# Altium PCB PCB1.PcbDoc
Units mm, origin at the board's own origin, x right, y up, seen from the top; angles counter-clockwise.
Board outline 76.33 x 63.37 mm, 4 copper layers (L1 Top Layer, L2 GND, L3 POWER, L4 Bottom Layer), stack 1.586 mm thick; 47 components, 47 nets, 172 pads, 25 vias.
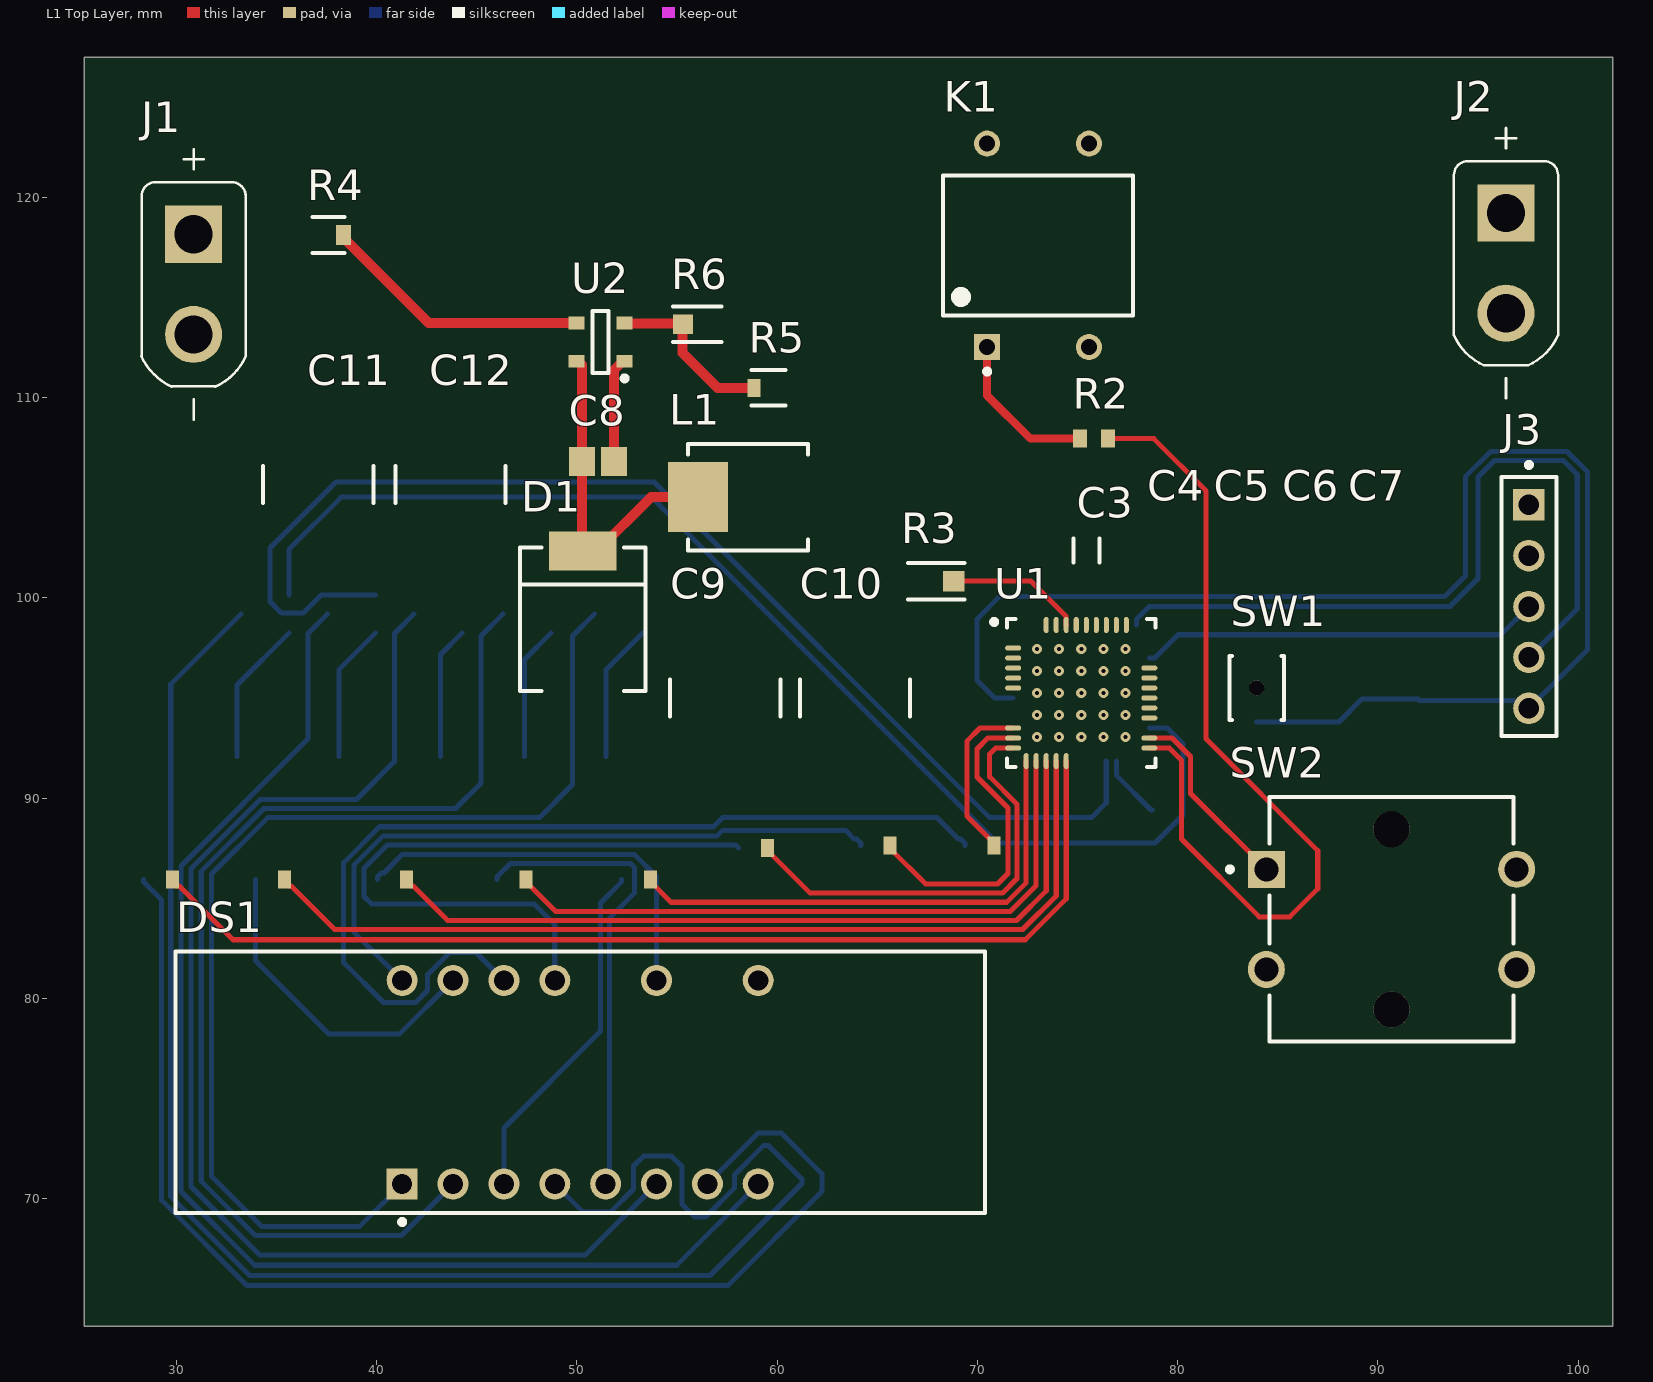
[diagram p0: L1 Top Layer view]
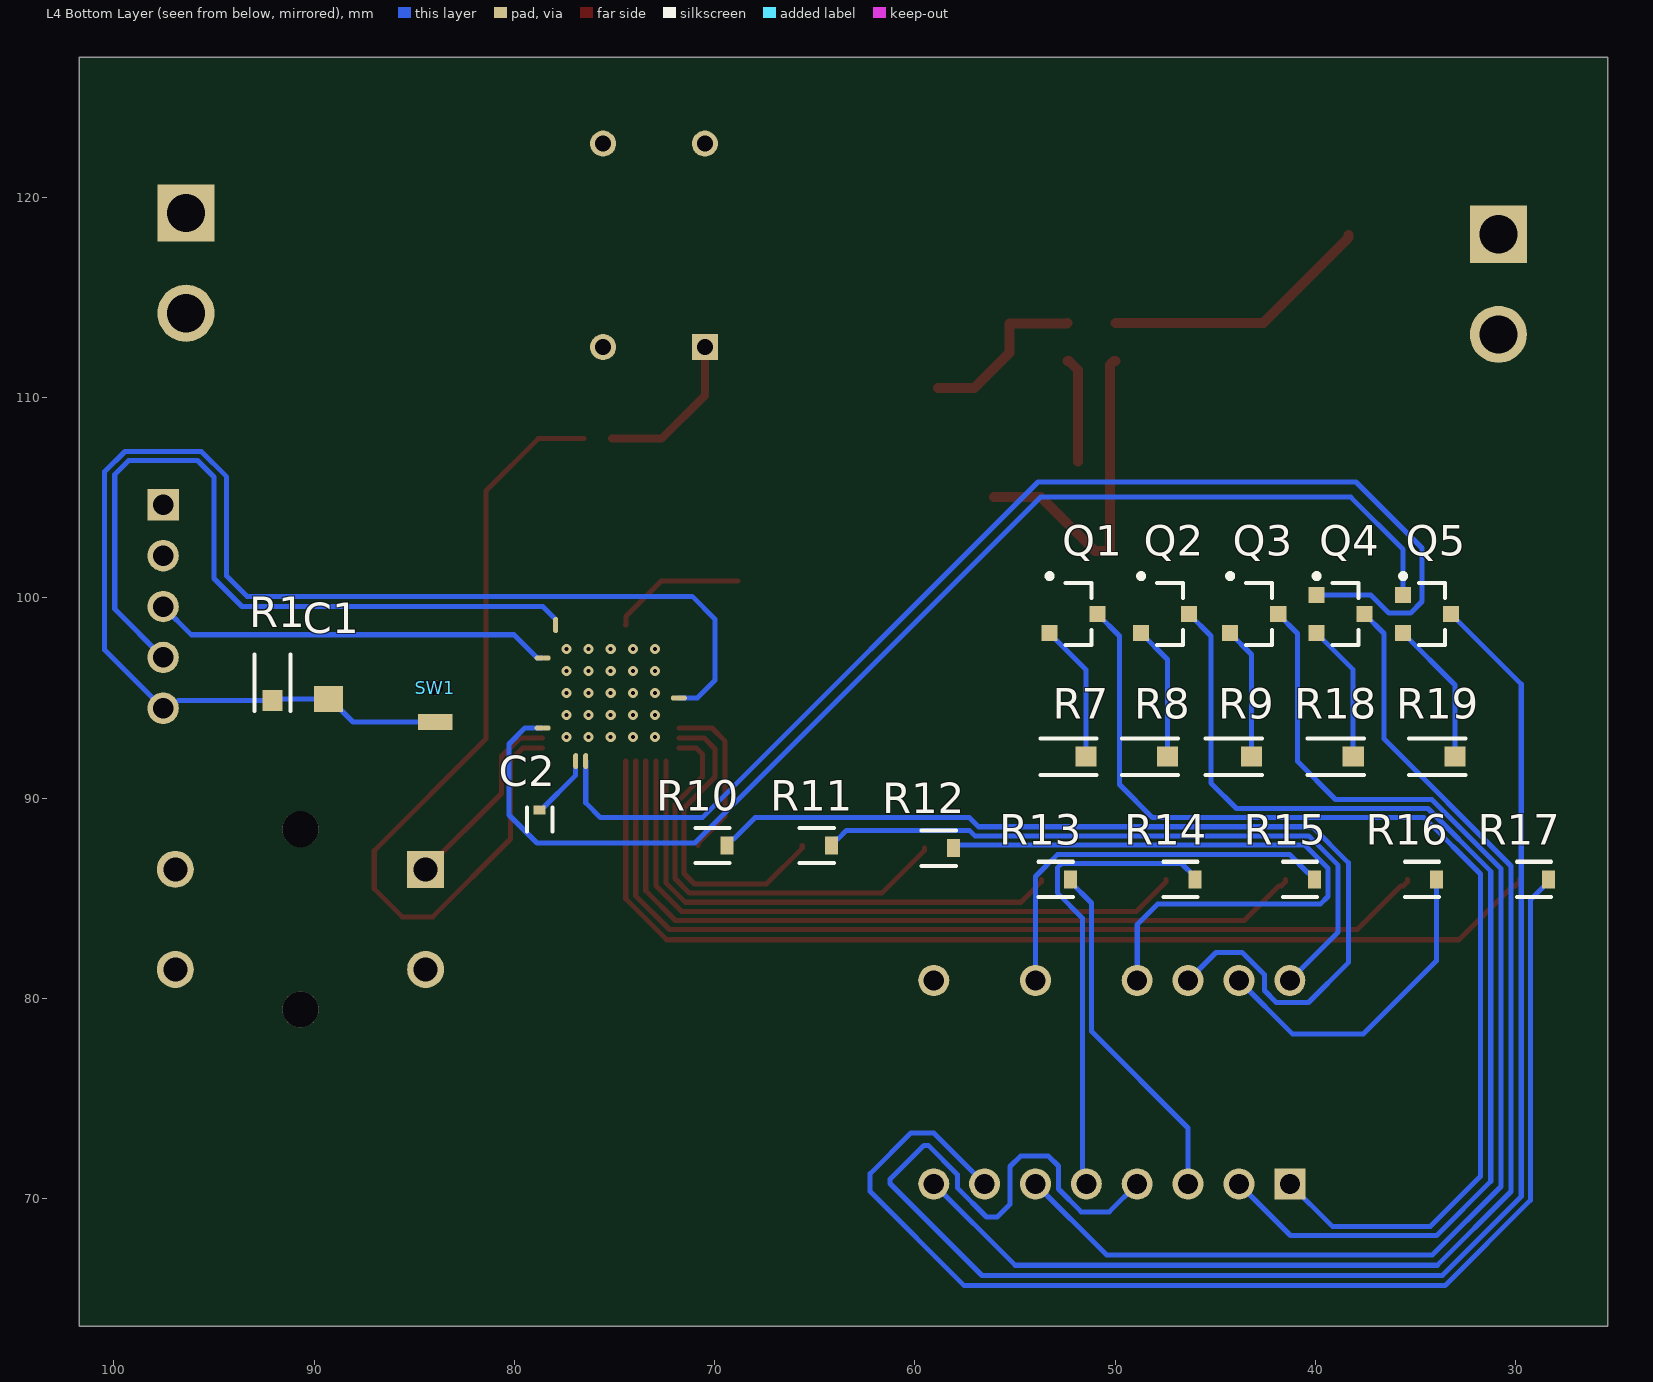
[diagram p1: L4 Bottom Layer view, seen from below]
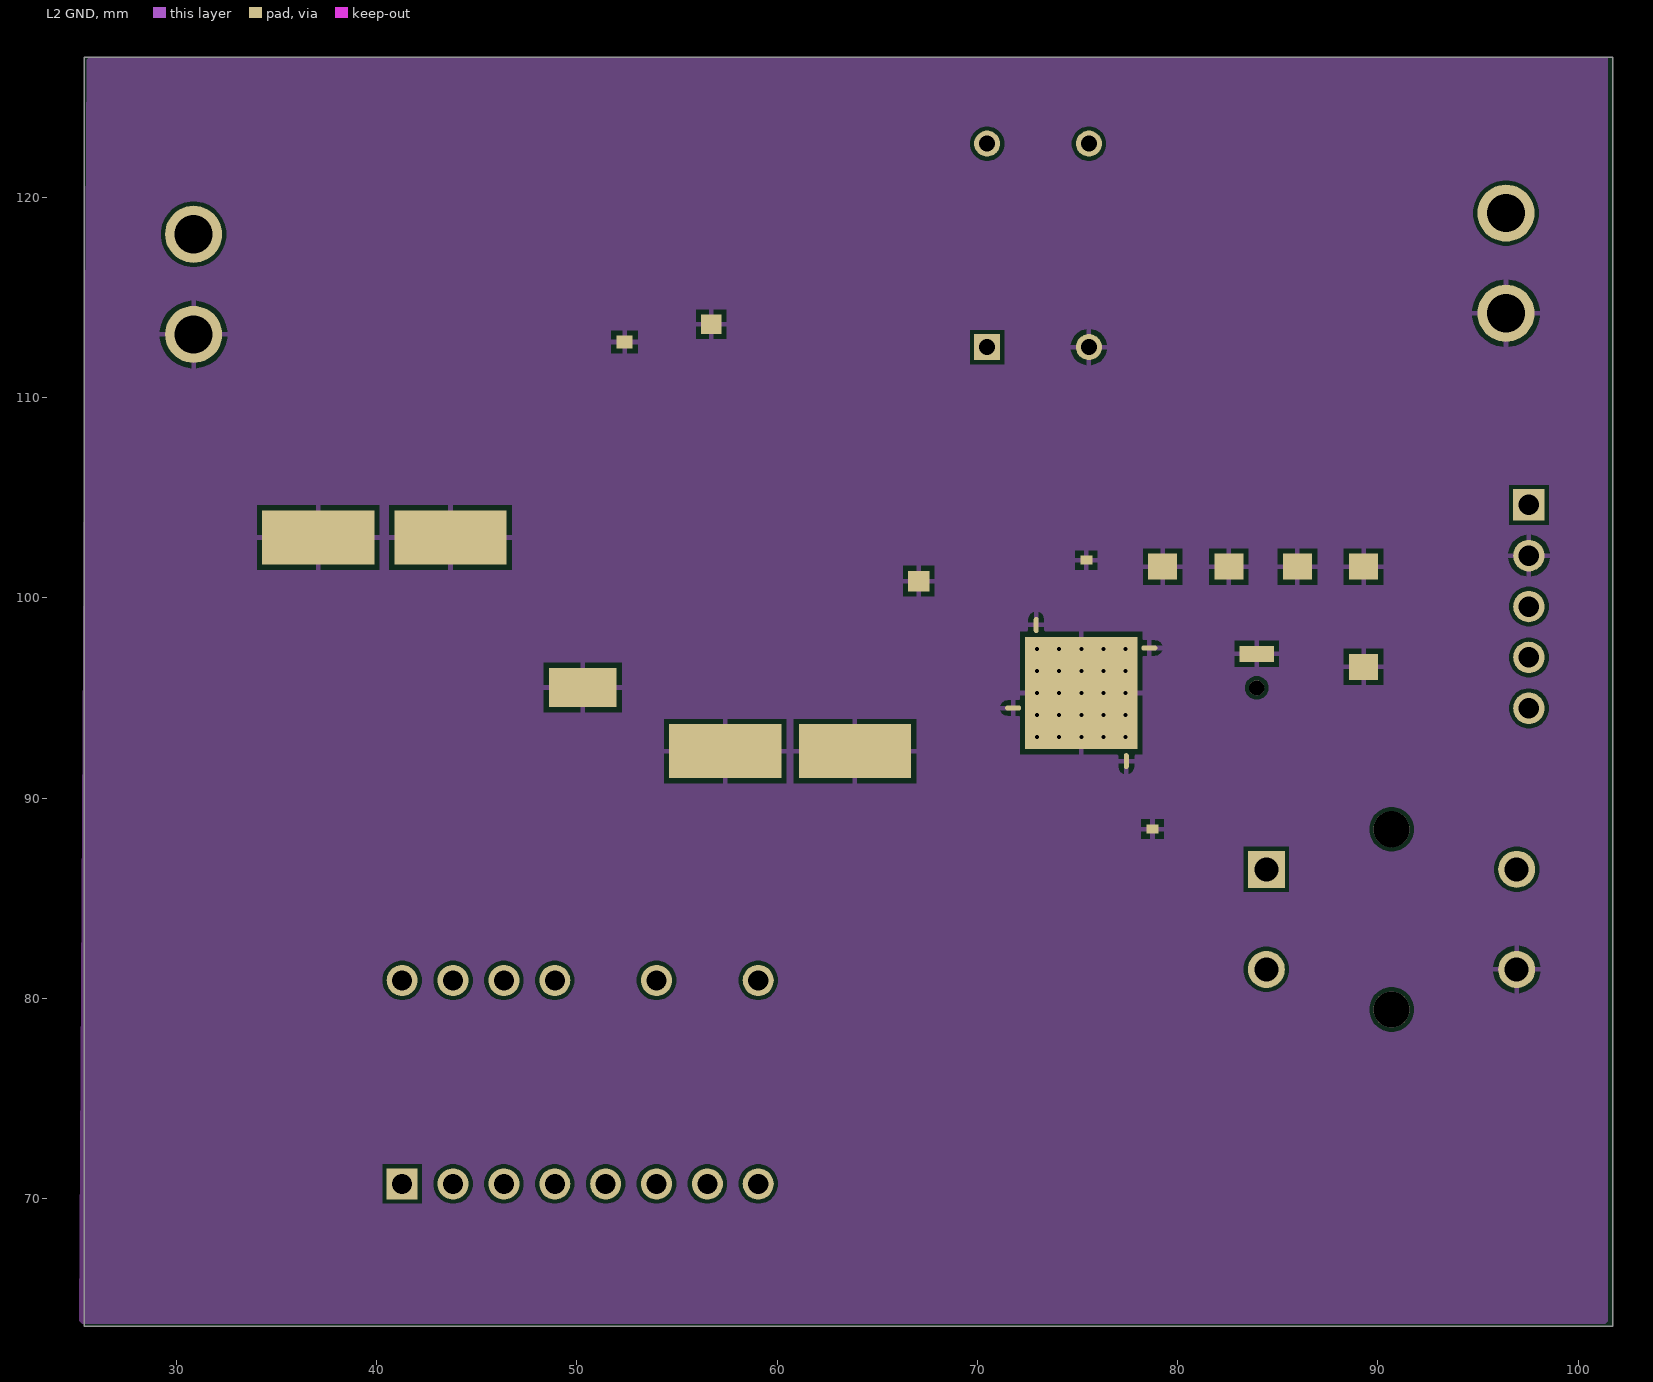
[diagram p2: L2 GND]
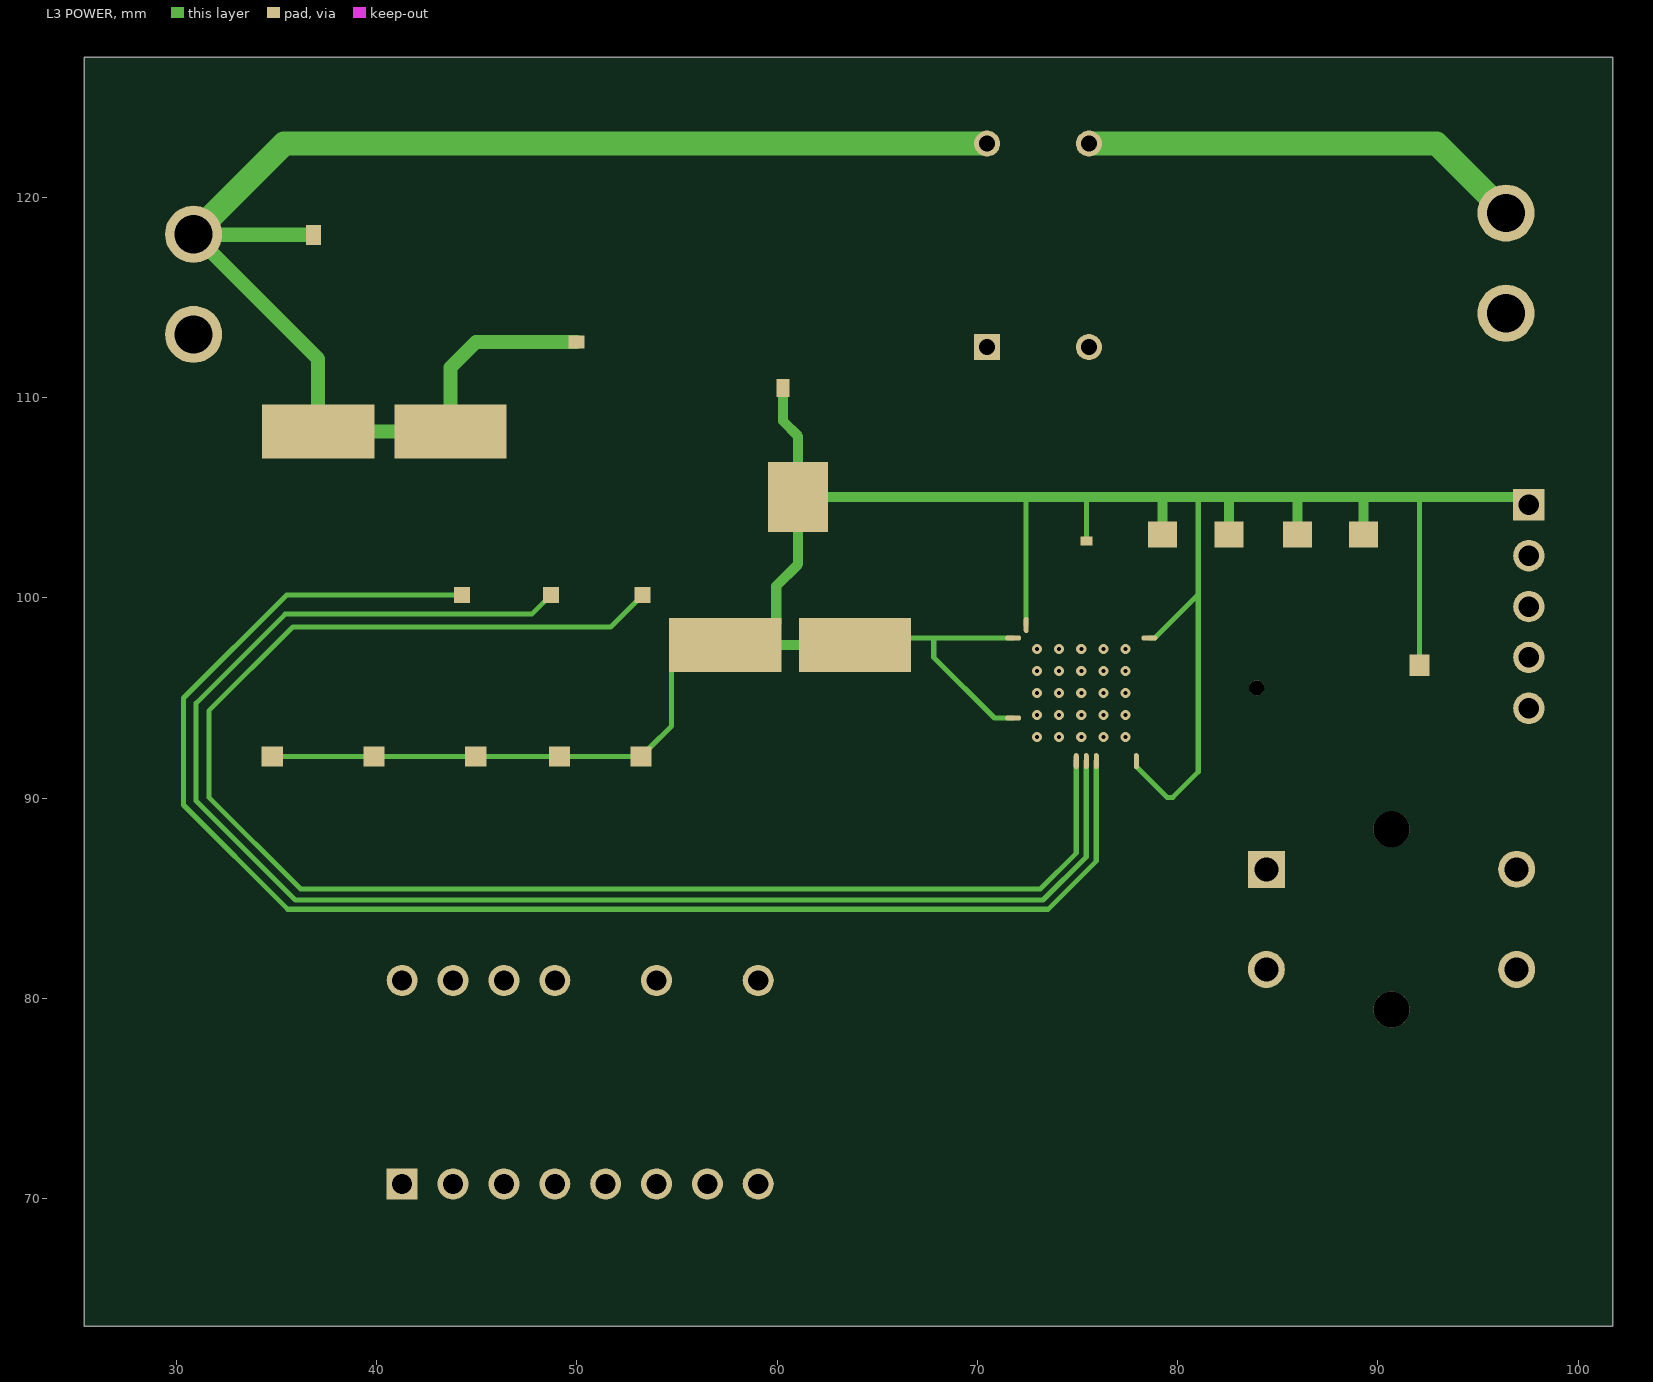
[diagram p3: L3 POWER]
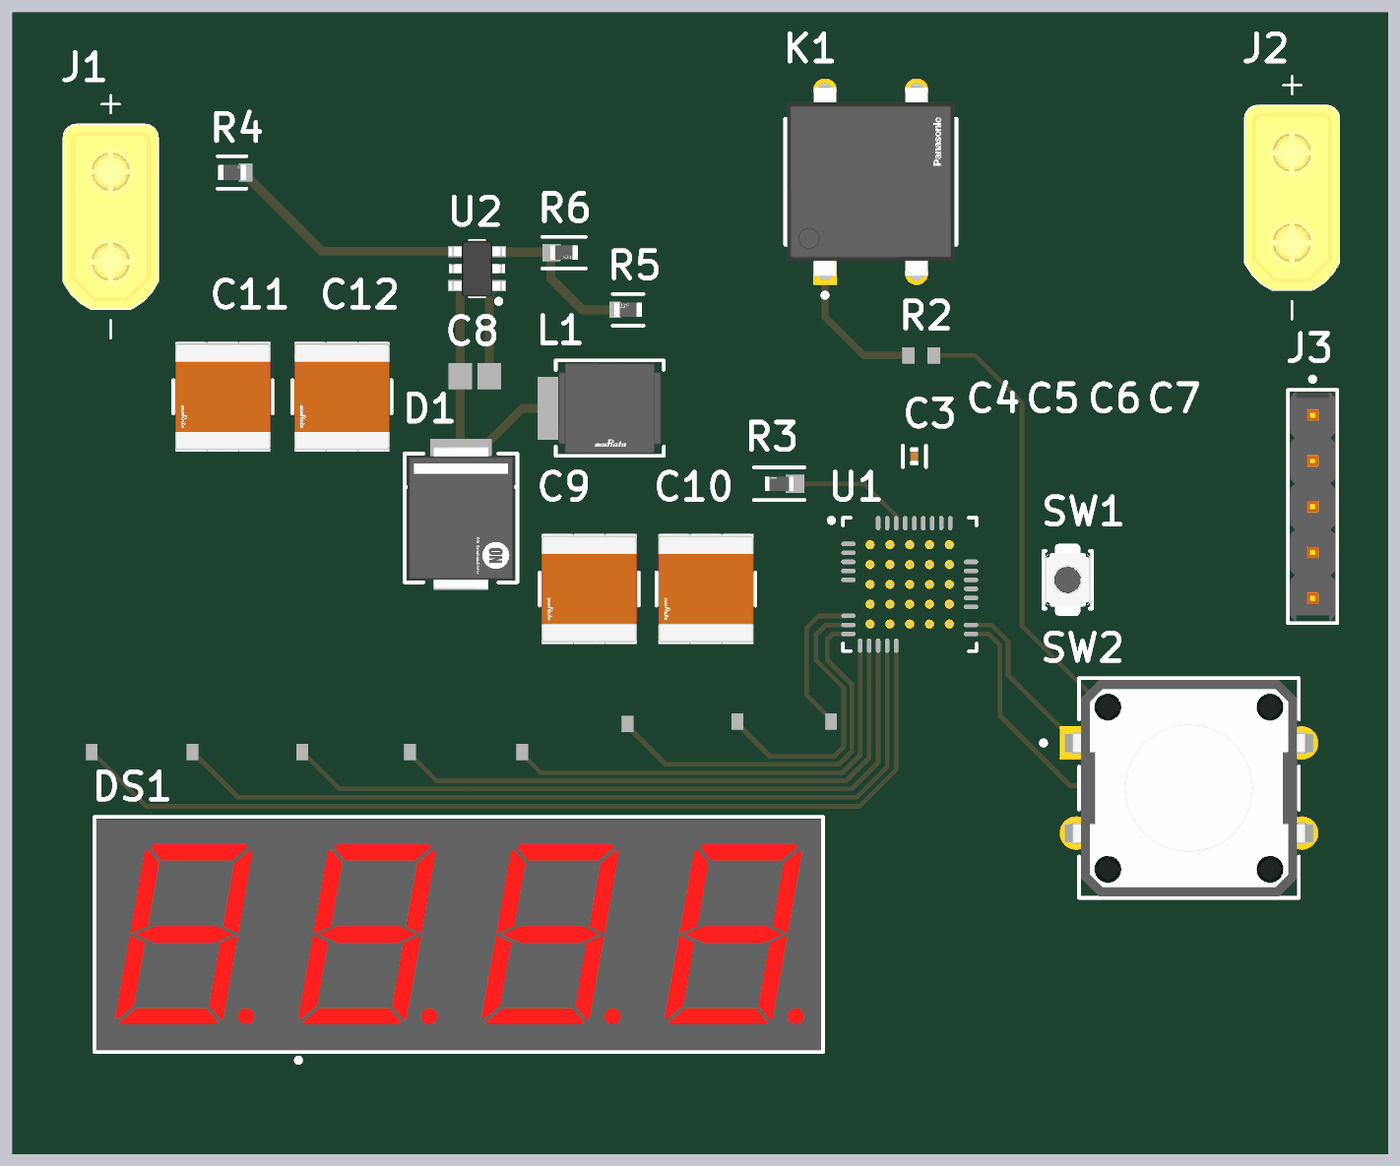
[diagram p4: 3D render of the assembled board from above, using the file's embedded part models]
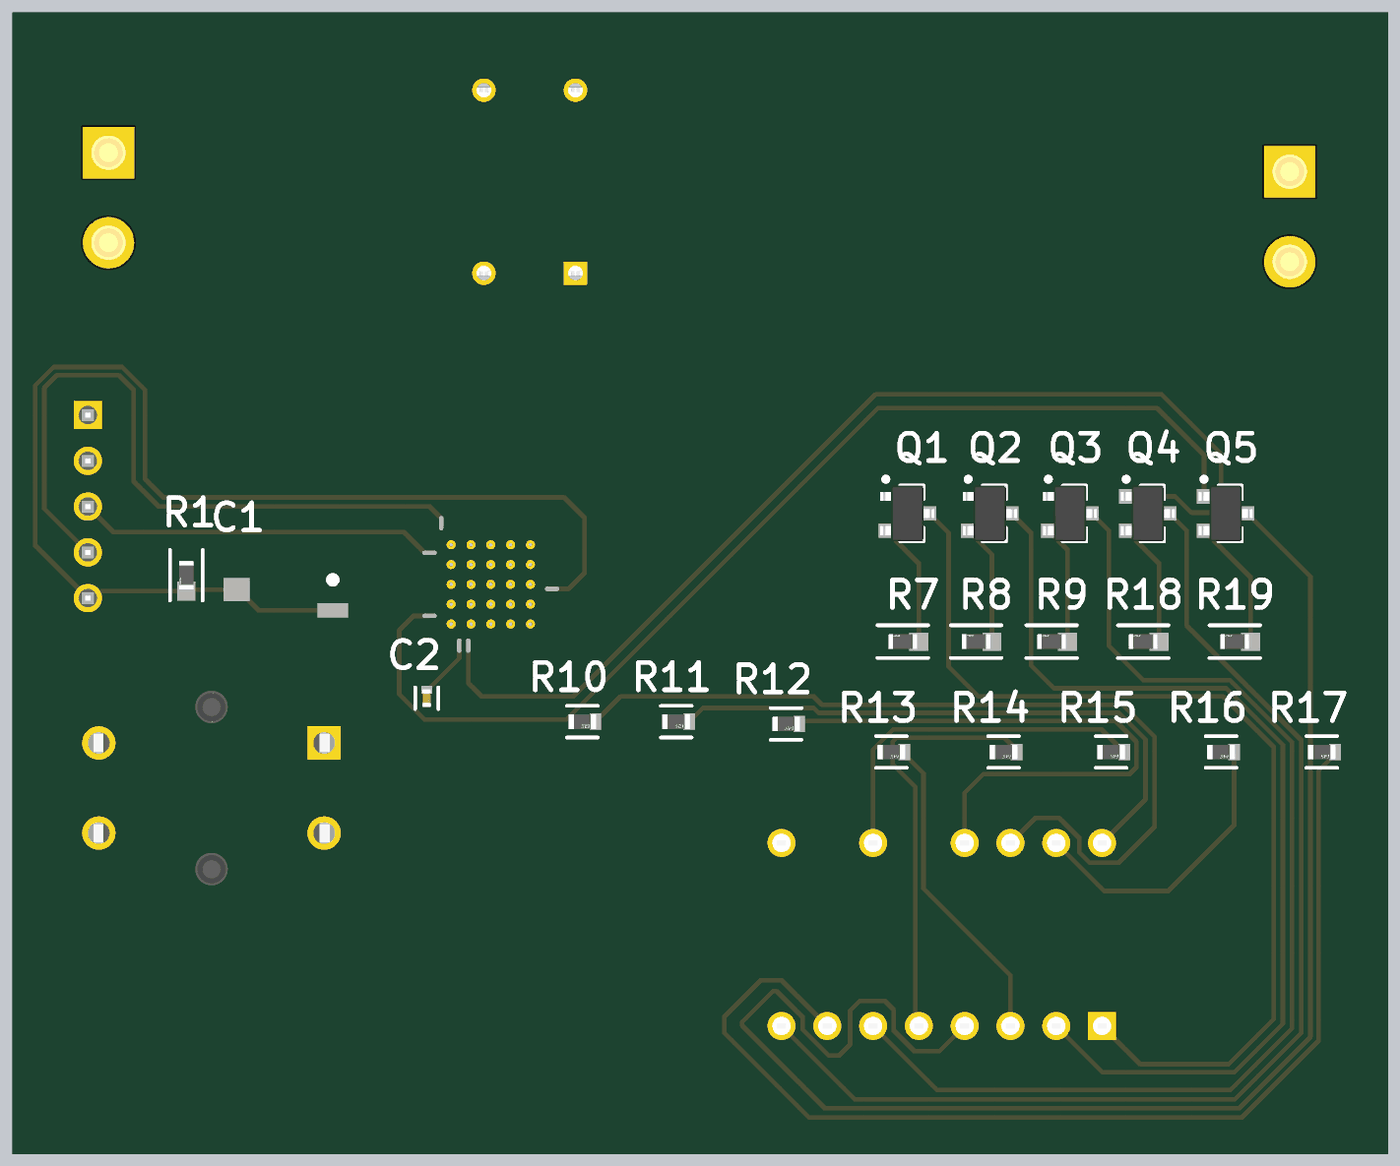
[diagram p5: 3D render of the assembled board from below, using the file's embedded part models]

## Layer stack, top to bottom
Top Solder: solder mask 0.0102, Solder Resist, Dk 3.5
L1 Top Layer: signal copper 0.035
Dielectric 2: prepreg 0.2104, PP-006, Dk 4.1
L2 GND: signal copper 0.0152
Dielectric 1: dielectric 1.065, FR-4, Dk 4.8
L3 POWER: signal copper 0.0152
Dielectric 3: prepreg 0.2104, PP-006, Dk 4.1
L4 Bottom Layer: signal copper 0.035
Bottom Solder: solder mask 0.0102, Solder Resist, Dk 3.5

## Board outline
25.4,63.627 101.727,63.627 101.727,127 25.4,127

## Design rules (kind name [scope] priority, off if disabled: settings)
Clearance [All] p1: gap=0.2 ignorepadtopadclearanceinfootprint=FALSE
MinimumSolderMaskSliver [All] p1: minsoldermaskwidth=0.2
PolygonConnect [All] p1: connectstyle=Relief reliefconductorwidth=0.254 reliefentries=4 polygonreliefangle="90 Angle" airgapwidth=0.254
RoutingVias [All] p1: holewidth=0.711 width=1.27 viastyle="Through Hole" minholewidth=0.711 minwidth=1.27 maxholewidth=0.711 maxwidth=1.27
SilkToSolderMaskClearance [IsPad] p1: minsilkscreentomaskgap=0.2 clearancetoexposedcopper=TRUE
SolderMaskExpansion [All] p1: expansion=0 istentingtop=FALSE
SupplyNets "Schematic Supply Nets_14" [InNet('RELAY_CTRL')] p1: voltage=0.000
SupplyNets "Schematic Supply Nets_13" [InNet('3V3')] p2: voltage=0.000
SupplyNets "Schematic Supply Nets_12" [InNet('SW2')] p3: voltage=0.000
SupplyNets "Schematic Supply Nets_11" [InNet('NRST')] p4: voltage=0.000
SupplyNets "Schematic Supply Nets_10" [InNet('CA 4')] p5: voltage=0.000
SupplyNets "Schematic Supply Nets_9" [InNet('CA L1/L2/L3')] p6: voltage=0.000
SupplyNets "Schematic Supply Nets_8" [InNet('SWCLK')] p7: voltage=0.000
SupplyNets "Schematic Supply Nets_7" [InNet('PB14')] p8: voltage=0.000
SupplyNets "Schematic Supply Nets_6" [InNet('SWDIO')] p9: voltage=0.000
SupplyNets "Schematic Supply Nets_5" [InNet('CA 2')] p10: voltage=0.000
SupplyNets "Schematic Supply Nets_4" [InNet('24V')] p11: voltage=0.000
SupplyNets "Schematic Supply Nets_3" [InNet('PB10')] p12: voltage=0.000
SupplyNets "Schematic Supply Nets_2" [InNet('CA 1')] p13: voltage=0.000
SupplyNets "Schematic Supply Nets_1" [InNet('CA 3')] p14: voltage=0.000
SupplyNets "Schematic Supply Nets" [InNet('GND')] p15: voltage=0.000
Width Width_24V_J2_Net [InNet('NetJ2_P')] p1: maxlimit=1.2 minlimit=0.6 preferedwidth=1
Width Width_24V_Net [InNet('24V')] p2: maxlimit=1.2 minlimit=0.6 preferedwidth=1
Width [All] p3: maxlimit=0.5 minlimit=0.2 preferedwidth=0.254
28 further rules are at their usual default settings.

## Classes and differential pairs
net class PB[0..2]: PB0 PB1 PB2
net class PA[0..7]: PA0 PA1 PA2 PA3 PA4 PA5 PA6 PA7
component class MCU: C1 C2 C3 C4 C5 C6 C7 J3 R1 R2 R3 SW1 SW2 U1
component class Main: J1 J2 K1
component class DC-DC: C8 C9 C10 C11 C12 D1 L1 R4 R5 R6 U2
component class 7segLED: DS1 Q1 Q2 Q3 Q4 Q5 R7 R8 R9 R10 R11 R12 R13 R14 R15 R16 R17 R18 R19

## Components (designator, comment, footprint, x,y, rotation, side; value= is the part's Value field where it differs from the comment)
C1 "C0805S104K5RACTU" CAPC2013X145X50NL20T25#1 89.281,95.758 r270 bottom
C2 "GRM155C80J475ME01D" FP-GRM155-0_2-MFG#1 78.74,88.933 r270 bottom
C3 "GRM155C80J475ME01D" FP-GRM155-0_2-MFG#2 75.438,102.362 r270 top
C4 "C0805S104K5RACTU" CAPC2013X145X50NL20T25#2 79.248,102.362 r90 top
C5 "C0805S104K5RACTU" CAPC2013X145X50NL20T25#2 82.55,102.362 r90 top
C6 "C0805S104K5RACTU" CAPC2013X145X50NL20T25#2 85.979,102.362 r90 top
C7 "C0805S104K5RACTU" CAPC2013X145X50NL20T25#2 89.281,102.362 r90 top
C8 "C0805S104K5RACTU" CAPC2013X145X50NL20T25#3 51.054,106.807 r180 top
C9 "KRM55LR71H106KH01K" FP-KRM55L-6_1_5_3_3_1_2-C-MFG 57.404,94.996 r270 top
C10 "KRM55LR71H106KH01K" FP-KRM55L-6_1_5_3_3_1_2-C-MFG 63.881,94.996 r270 top
C11 "KRM55LR71H106KH01K" FP-KRM55L-6_1_5_3_3_1_2-C-MFG 37.084,105.664 r270 top
C12 "KRM55LR71H106KH01K" FP-KRM55L-6_1_5_3_3_1_2-C-MFG 43.688,105.664 r270 top
D1 "SS36" FP-403AG-MFG 50.292,98.933 r270 top
DS1 "LTC-4627G" FP-LTC-4627G-MFG 50.165,75.819 r0 top
J1 "XT30UPB-M" AMASS_XT30UPB-M 30.861,115.657 r270 top
J2 "XT30UPB-M" AMASS_XT30UPB-M 96.393,116.713 r270 top
J3 "22-28-4057" FP-22-28-4057-MFG 97.536,99.568 r270 top
K1 "AQY272" FP-AQY272-MFG 73.025,117.602 r90 top
L1 "LQH55DN220M03L" FP-LQH55DN_03-MFG 58.547,105.029 r0 top
Q1 "AO3401A" AO-SOT-23-3L_V#1 52.07,99.187 r180 bottom
Q2 "AO3401A" AO-SOT-23-3L_V#1 47.498,99.187 r180 bottom
Q3 "AO3401A" AO-SOT-23-3L_V#1 43.053,99.187 r180 bottom
Q4 "AO3401A" AO-SOT-23-3L_V#2 38.735,99.187 r180 bottom
Q5 "AO3401A" AO-SOT-23-3L_V#2 34.417,99.187 r180 bottom
R1 "AC0603JR-7W10KL" FP-AC0603-IPC_A#1 92.075,95.758 r270 bottom
R2 "RC0603FR-07330RL" RESC1608X55X25NL10T15 75.819,107.95 r180 top
R3 "AC0603JR-7W10KL" FP-AC0603-IPC_A#2 67.945,100.838 r180 top
R4 "CRCW0603100KFKEI" FP-CRCW0603-e3-MFG 37.592,118.11 r0 top
R5 "RMCF0603FG49K9" FP-RMCF0603-MFG#1 59.563,110.49 r180 top
R6 "RMCF0603FT15K8" FP-RMCF0603-IPC_B 56.007,113.665 r0 top
R7 "AC0603JR-7W10KL" FP-AC0603-IPC_A#3 52.324,92.075 r0 bottom
R8 "AC0603JR-7W10KL" FP-AC0603-IPC_A#3 48.26,92.075 r0 bottom
R9 "AC0603JR-7W10KL" FP-AC0603-IPC_A#3 44.069,92.075 r0 bottom
R10 "RMCF0603JG220R" FP-RMCF0603-MFG#2 70.104,87.63 r180 bottom
R11 "RMCF0603JG220R" FP-RMCF0603-MFG#2 64.897,87.63 r180 bottom
R12 "RMCF0603JG220R" FP-RMCF0603-MFG#2 58.801,87.503 r180 bottom
R13 "RMCF0603JG220R" FP-RMCF0603-MFG#2 52.959,85.946 r180 bottom
R14 "RMCF0603JG220R" FP-RMCF0603-MFG#2 46.736,85.946 r180 bottom
R15 "RMCF0603JG220R" FP-RMCF0603-MFG#2 40.767,85.946 r180 bottom
R16 "RMCF0603JG220R" FP-RMCF0603-MFG#2 34.671,85.946 r180 bottom
R17 "RMCF0603JG220R" FP-RMCF0603-MFG#2 29.083,85.946 r180 bottom
R18 "AC0603JR-7W10KL" FP-AC0603-IPC_A#3 38.989,92.075 r0 bottom
R19 "AC0603JR-7W10KL" FP-AC0603-IPC_A#3 33.909,92.075 r0 bottom
SW1 "B3U-1000P-B" FP-B3U-1000P-B-MFG 83.947,95.504 r90 top
SW2 "B3F-4000" FP-B3F-4000-MFG 90.678,83.947 r0 top
U1 "STM32F401CBU6TR" STM-UFQFPN48_L 75.184,95.25 r0 top
U2 "AOZ1282CI" AO-SOT23-6L-6_V 51.181,112.776 r180 top

## Footprints (in the part's own frame and the unit in brackets; to place one, negate y for a bottom-side part, rotate by r counter-clockwise, add the part's x,y. Pads: shape width x height; smd on the part's side, far side on the other; paste and mask are expansions set on the pad)
AMASS_XT30UPB-M [mm]
  round 2.85 hole 1.9 mask+0.102: N(2.5,0)
  rect 2.85x2.85 / inner round 2.85 / far side rect 2.85x2.85 hole 1.9 mask+0.102: P(-2.5,0)
  silkscreen extent -6.75,-2.61 6.75,2.61, body extent -5.1,-2.6 5.1,2.6, height 10.7
AO-SOT23-6L-6_V [mm] "SOT23, 6-Leads, Body 3.1x1.7mm, Pitch 0.95mm"
  rect 0.8x0.63 smd: 1(-1.2,0.95) 3(-1.2,-0.95) 4(1.2,-0.95) 6(1.2,0.95)
  rect 0.8x0.63 on Mid1: 2(-1.2,0)
  rect 0.8x0.63 on Mid2: 5(1.2,0)
  silkscreen extent -1.33,-1.55 0.4,1.94, body extent -1.55,-1.55 1.55,1.55, height 1.25
AO-SOT-23-3L_V#1 [mm] "SOT23, 3-Leads, Body 3.1x1.8mm, Pitch 0.95mm"
  rect 0.8x0.8 on Mid2: 1(-1.2,0.95)
  rect 0.8x0.8 smd: 2(-1.2,-0.95) 3(1.2,0)
  silkscreen extent -1.33,-1.55 0.9,2.02, body extent -1.5,-1.55 1.5,1.55, height 1.25
AO-SOT-23-3L_V#2 [mm] "SOT23, 3-Leads, Body 3.1x1.8mm, Pitch 0.95mm"
  rect 0.8x0.8 smd: 1(-1.2,0.95) 2(-1.2,-0.95) 3(1.2,0)
  silkscreen extent -1.33,-1.55 0.9,2.02, body extent -1.5,-1.55 1.5,1.55, height 1.25
CAPC2013X145X50NL20T25#1 [mm] "Chip Capacitor, 2-Leads, Body 2.00x1.25mm, IPC Medium Density"
  rect 1.3x1.45 on Mid1: 1(-0.8,0)
  rect 1.3x1.45 smd: 2(0.8,0)
  body extent -1.1,-0.72 1.1,0.72, height 1.45
CAPC2013X145X50NL20T25#2 [mm] "Chip Capacitor, 2-Leads, Body 2.00x1.25mm, IPC Medium Density"
  rect 1.3x1.45 on Mid1: 1(-0.8,0)
  rect 1.3x1.45 on Mid2: 2(0.8,0)
  body extent -1.1,-0.72 1.1,0.72, height 1.45
CAPC2013X145X50NL20T25#3 [mm] "Chip Capacitor, 2-Leads, Body 2.00x1.25mm, IPC Medium Density"
  rect 1.3x1.45 smd: 1(-0.8,0) 2(0.8,0)
  body extent -1.1,-0.72 1.1,0.72, height 1.45
FP-22-28-4057-MFG [mm]
  rect 1.57x1.57 hole 1.02 paste-2539.97 mask+0: 1(-5.08,0)
  round 1.57 hole 1.02 paste-2539.97 mask+0: 2(-2.54,0) 3(0,0) 4(2.54,0) 5(5.08,0)
  silkscreen extent -7.2,-1.37 6.48,1.37, body extent -6.58,-1.47 6.58,1.47, height 0.25
FP-403AG-MFG [mm]
  rect 1.96x3.39 smd paste+0 mask+0: 1(-3.405,0)
  rect 1.96x3.39 on Mid1 paste+0 mask+0: 2(3.405,0)
  silkscreen extent -3.57,-3.13 3.57,3.13, body extent -3.98,-2.95 3.98,2.95, height 2.65
FP-AC0603-IPC_A#1 [mm]
  rect 1.059x1.012 on Mid2 paste+0 mask+0: 1(-0.877,0)
  rect 1.059x1.012 smd paste+0 mask+0: 2(0.877,0)
  silkscreen extent -1.41,-0.91 1.41,0.91, body extent -0.8,-0.4 0.8,0.4, height 0.55
FP-AC0603-IPC_A#2 [mm]
  rect 1.059x1.012 smd paste+0 mask+0: 1(-0.877,0)
  rect 1.059x1.012 on Mid1 paste+0 mask+0: 2(0.877,0)
  silkscreen extent -1.41,-0.91 1.41,0.91, body extent -1.91,-1.01 1.91,1.01, height 0.25
FP-AC0603-IPC_A#3 [mm]
  rect 1.059x1.012 smd paste+0 mask+0: 1(-0.877,0)
  rect 1.059x1.012 on Mid2 paste+0 mask+0: 2(0.877,0)
  silkscreen extent -1.41,-0.91 1.41,0.91, body extent -0.8,-0.4 0.8,0.4, height 0.55
FP-AQY272-MFG [mm]
  rect 1.3x1.3 hole 0.8 paste-2539.97 mask+0: 1(-5.08,2.54)
  round 1.3 hole 0.8 paste-2539.97 mask+0: 2(-5.08,-2.54) 3(5.08,-2.54) 4(5.08,2.54)
  silkscreen extent -6.42,-4.75 3.5,4.75, body extent -5.83,-4.85 5.83,4.85, height 0.25
FP-B3F-4000-MFG [mm]
  rect 1.85x1.85 hole 1.2 paste-2539.97 mask+0: 1(-6.25,2.5)
  round 1.85 hole 1.2 paste-2539.97 mask+0: 2(6.25,2.5) 3(-6.25,-2.5) 4(6.25,-2.5)
  round 1.8 hole 1.8 unplated paste-2539.97 mask+0: ""(0,-4.5) ""(0,4.5)
  silkscreen extent -8.2,-6.1 6.1,6.1, body extent -7.27,-6.2 7.27,6.2, height 0.25
FP-B3U-1000P-B-MFG [mm]
  rect 0.8x1.7 smd far side paste+0 mask+0: 1(-1.7,0)
  rect 0.8x1.7 on Mid1 paste+0 mask+0: 2(1.7,0)
  round 0.75 hole 0.75 unplated paste-2539.97 mask+0: ""(0,0)
  silkscreen extent -1.6,-1.35 1.6,1.35, body extent -2.2,-1.45 2.2,1.45, height 0.25
FP-CRCW0603-e3-MFG [mm]
  rect 0.75x1 on Mid2 paste+0 mask+0: 1(-0.75,0)
  rect 0.75x1 smd paste+0 mask+0: 2(0.75,0)
  silkscreen extent -0.8,-0.9 0.8,0.9, body extent -0.77,-0.43 0.77,0.43, height 0.5
FP-GRM155-0_2-MFG#1 [mm]
  rect 0.45x0.6 smd paste+0 mask+0: 1(-0.475,0)
  rect 0.45x0.6 on Mid1 paste+0 mask+0: 2(0.475,0)
  silkscreen extent -0.6,-0.64 0.6,0.65, body extent -0.5,-0.25 0.5,0.25, height 0.7
FP-GRM155-0_2-MFG#2 [mm]
  rect 0.45x0.6 on Mid2 paste+0 mask+0: 1(-0.475,0)
  rect 0.45x0.6 on Mid1 paste+0 mask+0: 2(0.475,0)
  silkscreen extent -0.6,-0.64 0.6,0.65, body extent -0.8,-0.45 0.8,0.45, height 0.25
FP-KRM55L-6_1_5_3_3_1_2-C-MFG [mm]
  rect 2.7x5.6 on Mid2 paste+0 mask+0: 1(-2.65,0)
  rect 2.7x5.6 on Mid1 paste+0 mask+0: 2(2.65,0)
  silkscreen extent -0.92,-2.75 0.92,2.75, body extent -4.1,-2.9 4.1,2.9, height 0.25
FP-LQH55DN_03-MFG [mm]
  rect 3x3.5 smd paste+0 mask+0: 1(-2.5,0)
  rect 3x3.5 on Mid2 paste+0 mask+0: 2(2.5,0)
  silkscreen extent -3,-2.65 3,2.65, body extent -4.1,-2.75 4.1,2.75, height 0.25
FP-LTC-4627G-MFG [mm]
  rect 1.55x1.55 hole 1 paste-2539.97 mask+0: 1(-8.89,-5.08)
  round 1.55 hole 1 paste-2539.97 mask+0: 2(-6.35,-5.08) 3(-3.81,-5.08) 4(-1.27,-5.08) 5(1.27,-5.08) 6(3.81,-5.08) 7(6.35,-5.08) 8(8.89,-5.08) 9(8.89,5.08) 11(3.81,5.08) 13(-1.27,5.08) 14(-3.81,5.08) 15(-6.35,5.08) 16(-8.89,5.08)
  silkscreen extent -20.21,-7.1 20.21,6.53, body extent -20.31,-6.63 20.31,6.63, height 0.25
FP-RMCF0603-IPC_B [mm]
  rect 1.006x0.958 smd paste+0 mask+0: 1(-0.701,0)
  rect 1.006x0.958 on Mid1 paste+0 mask+0: 2(0.701,0)
  silkscreen extent -1.2,-0.88 1.2,0.88, body extent -1.45,-0.73 1.45,0.73, height 0.25
FP-RMCF0603-MFG#1 [mm]
  rect 0.65x0.9 on Mid2 paste+0 mask+0: 1(-0.725,0)
  rect 0.65x0.9 smd paste+0 mask+0: 2(0.725,0)
  silkscreen extent -0.85,-0.88 0.85,0.88, body extent -1.15,-0.58 1.15,0.58, height 0.25
FP-RMCF0603-MFG#2 [mm]
  rect 0.65x0.9 smd far side paste+0 mask+0: 1(-0.725,0)
  rect 0.65x0.9 smd paste+0 mask+0: 2(0.725,0)
  silkscreen extent -0.85,-0.88 0.85,0.88, body extent -0.77,-0.4 0.77,0.4, height 0.55
RESC1608X55X25NL10T15 [mm] "Chip Resistor, 2-Leads, Body 1.70x0.90mm, IPC Medium Density"
  rect 0.7x0.9 smd: 1(-0.7,0) 2(0.7,0)
  body extent -0.85,-0.45 0.85,0.45, height 0.55
STM-UFQFPN48_L [mm] "QFN, 48-Leads, Body 7.1x7.1mm, Pitch 0.5mm, Thermal Pad 5.6x5.6mm, IPC High Density"
  oval 0.8x0.25 on Mid2: 1(-3.4,2.75) 9(-3.4,-1.25) 36(3.4,2.75)
  oval 0.8x0.25 smd: 2(-3.4,2.25) 3(-3.4,1.75) 4(-3.4,1.25) 5(-3.4,0.75) 6(-3.4,0.25) 10(-3.4,-1.75) 11(-3.4,-2.25) 12(-3.4,-2.75) 25(3.4,-2.75) 26(3.4,-2.25) 28(3.4,-1.25) 29(3.4,-0.75) 30(3.4,-0.25) 31(3.4,0.25) 32(3.4,0.75) 33(3.4,1.25)
  oval 0.8x0.25 smd far side: 7(-3.4,-0.25) 27(3.4,-1.75) 34(3.4,1.75)
  oval 0.8x0.25 on Mid1: 8(-3.4,-0.75) 35(3.4,2.25)
  oval 0.25x0.8 smd: 13(-2.75,-3.4) 14(-2.25,-3.4) 15(-1.75,-3.4) 16(-1.25,-3.4) 17(-0.75,-3.4) 38(2.25,3.4) 39(1.75,3.4) 40(1.25,3.4) 41(0.75,3.4) 42(0.25,3.4) 43(-0.25,3.4) 44(-0.75,3.4) 45(-1.25,3.4) 46(-1.75,3.4)
  oval 0.25x0.8 on Mid2: 18(-0.25,-3.4) 19(0.25,-3.4) 20(0.75,-3.4) 24(2.75,-3.4) 48(-2.75,3.4)
  oval 0.25x0.8 smd far side: 21(1.25,-3.4) 22(1.75,-3.4) 37(2.75,3.4)
  oval 0.25x0.8 on Mid1: 23(2.25,-3.4) 47(-2.25,3.4)
  rect 5.6x5.6 on Mid1: 49(0,0)
  silkscreen extent -4.47,-3.7 3.7,3.7, body extent -3.55,-3.55 3.55,3.55, height 0.6

## Part data
C1 C4 C5 C6 C7 C8: library part CMP-2007-01227-1, "100 nF 50 VDC X7R 10 % 0805", Manufacturer=Kemet, Part Number=C0805S104K5RACTU
C2 C3: library part CMP-00260-151029462-1, "4.7 uF / GRM155C80J475ME01D", Capacitance=4.7µF, Case/Package=0402, Dielectric=X6S, Voltage Rating (DC)=6.3V, Length=1mm, NexarPartId=151029462, Thickness=500µm, Width=500µm
C9 C10 C11 C12: library part CMP-06035-010592-1, "Cap Ceramic Multilayer 10uF 50V ±10% 2220 Emboss T/R"
D1: library part CMP-07162-000004-1, "DIODE SCHOTTKY 60V 3A SMC", Forward Current=3A, Manufacturer="ON Semiconductor", Max Junction Temp=+150°C, Max Repetitive Reverse Voltage=60V, Max Surge Forward Current=100A, Package=403AG, Peak Reverse Current=0.5mA, Temperature="-55°C to +150°C", Temperature Range Low=-55°C, Automotive=No, Category=Diode, ComponentLink2Description=Datasheet, ComponentLink2URL=https://www.onsemi.com/pub/Collateral/SS39-D.PDF, Device Class L1="Discrete Semiconductors", Device Class L2=Diodes, Device Class L3="Schottky Diodes", Digikey Description="DIODE SCHOTTKY 60V 3A SMC", Footprint Url=https://www.onsemi.com/pub/Collateral/403AG.PDF, Height=2.65mm, Lead Free=Yes, Manufacturer Part Number=SS36, Mouser Description="In a Pack of 25, ON Semi 60V 3A, Schottky Diode, 2-Pin DO-214AB SS36", Octopart=https://octopart.com/ss36-on+semiconductor-84331627, RoHS=TRUE, Standoff Height=0.05mm, Temperature Range High=+150°C
DS1: library part CMP-2000-06610-2, "LED 7-SEG 4DIGIT GRN 0.4\" CA", Forward Current=20mA, Forward Voltage=2.1V, Manufacturer=Lite-On, Package=0, Power Dissipation=75mW, Reverse Voltage=5V, Temperature="-35°C to +85°C", Temperature Range High=+85°C, Temperature Range Low=-35°C, Automotive=No, Category=Disp, ComponentLink2Description=Datasheet, ComponentLink2URL=https://datasheet.ciiva.com/15136/getdatasheetpartid-630597-15136600.pdf, Device Class L1=Optoelectronics, Device Class L2=Displays, Device Class L3="LED Displays", Digikey Description="LED 7-SEG 4DIGIT GRN 0.4\" CA", Display Type=LED, Element Config="Common Anode", Height=7.25mm, Lead Free=Yes, Luminous Intensity=2.2mcd, Manufacturer Part Number=LTC-4627G, Mouser Description="LED Displays & Accessories 4 Digit, Green", Octopart=https://octopart.com/ltc-4627g-lite-on-8442722, RoHS=TRUE, Test Current=20mA, Wavelength=569nm
J1 J2: "Socket; DC supply; XT30; male; PIN: 2; on PCBs; THT; yellow; 15A; 500V", Package=None, Check_prices=https://www.snapeda.com/parts/XT30UPB-M/AMASS/view-part/?ref=eda, MF=amass, MP=XT30UPB-M, SnapEDA_Link=https://www.snapeda.com/parts/XT30UPB-M/AMASS/view-part/?ref=snap
J3: library part CMP-04776-001007-1, "KK 100 HDR ASSY BKWY 05 CKT 30 S", Color=Black, Contact Resistance=20mR, Current Rating=4A, Max Operating Temperature=75°C, Max Voltage Rating (DC)=250.25kV, Min Operating Temperature=0°C, Package Quantity=1, Voltage Rating=250V, Connector Type="Male Pin", Contact Material=Brass, Contact Mating Length=0.32inch, Contact Plating=Gold, Contact Type="Male Pin", Gender=Male, Glow Wire Compliant=Non-compliant, Housing Color=Black, Housing Material=Thermoplastic, Lead Free="Lead Free", Mount="Through Hole", Number of Circuits=5, Number of Contacts=5, Number of Positions=5, Number of Rows=1, Orientation=Straight, Packaging=Bulk, Pitch=2.54mm, RoHS Compliant=Yes, Series=42375, Termination=Solder
K1: library part CMP-05609-000164-1, "SSR RELAY SPST-NO 2A 0-60V", Capacitance=1.5pF, Case/Package=DIP, Contact Resistance=110mR, Current Rating=2A, Forward Current=50mA, Isolation Voltage=2.5kV, Max Input Voltage=1.5V, Max Operating Temperature=85°C, Max Output Voltage=60V, Min Operating Temperature=-40°C, On-State Resistance=180mR, Package Quantity=50, Approvals=cULus, Input Current=50mA, Lead Free="Lead Free", Load Current=2A, Max Input Current=50mA, Max Output Current=2A, Mount="Through Hole", Number of Pins=4, Output Current=2A, Output Voltage=60V, Packaging=Rail/Tube, Radiation Hardening=No, REACH SVHC="No SVHC", Relay Type=Relay, RoHS Compliant=Yes, Termination="PC Pin", Test Voltage=2.5kV, Throw Configuration=SPST, Voltage Rating (AC)=60V
L1: library part CMP-06042-011077-1, "Wire Wound Ferrite Inductor for Power Lines 22μH ±20% 0.266Ω  1.2A 2220", Case Code (Imperial)=2220, Case Code (Metric)=5750, Current Rating=1.2A, DC Resistance (DCR)=190mR, Inductance=22uH, Inductance Tolerance=20%, Max Operating Temperature=80°C, Min Operating Temperature=-25°C, Package Quantity=350, Resistor Type=Wirewound, Self Resonant Frequency=15MHz, Test Frequency=1MHz, Case/Package=2220, Core Material=Ferrite, DC Current=1.2A, Depth=5.3mm, Height=4.7mm, Height - Seated (Max)=0.198inch, Lead Free="Lead Free", Length=5.7mm, Max DC Current=1.2A, Military Standard=Not, Mount="Surface Mount", Packaging="Tape and Reel", Radiation Hardening=No, REACH SVHC="No SVHC", Series Resistance=190mR, Shielding=Unshielded, Termination=SMD/SMT, Tolerance=20%, Weight=0.016932oz, Width=6mm
Q1 Q2 Q3 Q4 Q5: library part CMP-2000-05778-1, "P-Channel MOSFET, 30 V, 4 A, -55 to 150 degC, 3-Pin SOT-23-3L, RoHS, Tape and Reel", Continuous Drain Current=4A, Drain-Source On-Volt=30V, Frequency (Max)=NotRequiredMHz, Gate-Source Voltage (Max)=?12V, Manufacturer="Alpha and Omega", Operating Temp Range=-55Cto150C, Operating Temperature Classification=Military, Output Power (Max)=NotRequiredW, Package Description="3-Pin Small Outline Transistor, Body 2.95 x 1.6 mm, Pitch 0.95 mm", Package Reference=SOT-23-3L, Package Type=SOT-23, Power Dissipation=1.4W, Power Gain=NotRequireddB, Channel Mode=Enhancement, Datasheet URL=http://www.aosmd.com/res/data_sheets/AO3401A.pdf, Datasheet Version="Rev. 3, 03/2011", Drain Current (Max)=4A, Drain Efficiency=NotRequired%, Drain-Source On-Res=0.044ohm, Manufacturer URL=http://www.aosmd.com/, Mounting=SurfaceMount, Mounting Technology=SurfaceMount, Noise Figure=NotRequireddB, Number of  Elements=1, Package URL=http://www.aosmd.com/res/packaging_information/SOT-23-3L.pdf, Pin Count=3, Polarity=P, Rad Hardened=No, Type=PowerMOSFET
R1 R3 R7 R8 R9 R18 R19: library part CMP-03412-040683-1, "RES 10kΩ 5.00% 0.2W 0603"
R2: library part CMP-1659-00020-2, "Chip Resistor, 330 Ohm, +/- 1%, 0.1 W, -55 to 155 degC, 0603 (1608 Metric), RoHS, Tape and Reel", Capacitance="47 uF", Case Code (Imperial)=2917, Case Code (Metric)=7343, Max Operating Temperature=125degC, Min Operating Temperature=-55degC, Package Quantity=500, Tolerance=10%, Voltage Rating="16 V", Case/Package=2917, ComponentLink1Description="Manufacturer URL", ComponentLink1URL=http://www.yageo.com/, ComponentLink2Description=Datasheet, ComponentLink2URL=http://www.yageo.com/documents/recent/PYu-RC_Group_51_RoHS_L_04.pdf, DatasheetVersion="Rev. 4, 02/2016", ESR="800 mohm", Height="3.1 mm", Length="7.3 mm", Mount="Surface Mount", PackageDescription="2-Pin Surface Mount Device, Body 1.6 x 0.8 mm", PackageReference=0603, Packaging="Tape and Reel", Pins=2, Radiation Hardening=No, REACH SVHC="No SVHC", RoHSCompliant=True, Voltage Rating (DC)="16 V", Width="4.3 mm"
R4: library part CMP-02407-005189-1, "RES Thick Film, 100kΩ, 1%, 0.1W, 100ppm/°C, 0603", Case/Package=0603, Max Operating Temperature=155°C, Max Power Dissipation=100mW, Min Operating Temperature=-55°C, Package Quantity=5000, Resistance=100kR, Temperature Coefficient=100ppm/°C, Tolerance=1%, Composition="Thick Film", Features="Automotive AEC-Q200", Height=0.02inch, Lead Free="Lead Free", Length=0.061inch, Number of Terminations=2, Packaging="Tape and Reel", Width=0.033inch
R5: library part CMP-26527-006070-1, "49.9kΩ ±1% 0.1W 0603 Thick Film Chip Resistor AEC-Q200 compliant", Case Code (Imperial)=0603, Case Code (Metric)=1608, Max Operating Temperature=155°C, Max Power Dissipation=100mW, Min Operating Temperature=-55°C, Package Quantity=10000, Resistance=49.9kR, Resistor Type="Thick Film", Temperature Coefficient=100ppm/°C, Tolerance=1%, Case/Package=0603, Contact Plating=Tin, Features="Automotive AEC-Q200", Height=0.022inch, Length=0.061inch, Mount="Surface Mount", Number of Terminations=2, Packaging="Tape and Reel", Radiation Hardening=No, RoHS Compliant=Yes, Series=RMCF, Width=0.031inch
R6: library part CMP-26527-006657-1, "15.8kΩ ±1% 0.1W 0603 Thick Film Chip Resistor AEC-Q200 compliant", Case Code (Imperial)=0603, Case Code (Metric)=1608, Max Operating Temperature=155°C, Max Power Dissipation=100mW, Min Operating Temperature=-55°C, Resistance=15.8kR, Resistor Type="Thick Film", Temperature Coefficient=100ppm/°C, Tolerance=1%, Case/Package=0603, Contact Plating=Tin, Features="Automotive AEC-Q200", Height=0.022inch, Lead Free="Lead Free", Length=0.061inch, Mount="Surface Mount", Number of Terminations=2, Packaging="Tape and Reel", Radiation Hardening=No, RoHS Compliant=Yes, Series=RMCF, Width=0.031inch
R10 R11 R12 R13 R14 R15 R16 R17: library part CMP-26527-002055-1, "220Ω ±5% 0.1W 0603 Thick Film Chip Resistor AEC-Q200 compliant", Case/Package=0603, Max Operating Temperature=155°C, Min Operating Temperature=-55°C, Resistance=220R, Resistor Type="Thick Film", Temperature Coefficient=100ppm/°C, Tolerance=5%, Contact Plating=Tin, Mount="Surface Mount", Packaging="Tape and Reel", Radiation Hardening=No, RoHS Compliant=Yes
SW1: library part CMP-08834-000005-1, "SWITCH TACTILE SPST-NO 0.05A 12V", Ambient Temperature Range High=+70°C, Ambient Temperature Range Low=-25°C, Contact Current Rating=50mA, Contact Resistance=100mΩ, Manufacturer=Omron, Operating Force=1.5N, Package=0, Temperature="-25°C to +70°C", Voltage Rating Dc=12V, Automotive=No, Category=Switch, ComponentLink2Description=Datasheet, ComponentLink2URL=https://omronfs.omron.com/en_US/ecb/products/pdf/en-b3u.pdf, Device Class L1=Electromechanical, Device Class L2=Switches, Device Class L3="Tactile Switches", Digikey Description="SWITCH TACTILE SPST-NO 0.05A 12V", Electromechanical Life=200000Cycles, Height=1.75mm, Lead Free=Yes, Manufacturer Part Number=B3U-1000P-B, Mount="Surface Mount", Mouser Description="Tactile Switches Top Actuated with boss w/o ground", Octopart=https://octopart.com/b3u-1000p-b-omron-1057356, RoHS=TRUE, Temperature Range High=+70°C, Temperature Range Low=-25°C, Throw Configuration=SPST-NO
SW2: library part CMP-08834-000001-1, "SWITCH TACTILE SPST-NO 0.05A 24V", Ambient Temperature Range High=+70°C, Ambient Temperature Range Low=-25°C, Contact Current Rating=50mA, Contact Resistance=100mΩ, Manufacturer=Omron, Operating Force=1.27N, Temperature="-25°C to +70°C", Voltage Rating Dc=24V, Automotive=No, Category=Switch, ComponentLink2Description=Datasheet, ComponentLink2URL=https://omronfs.omron.com/en_US/ecb/products/pdf/en-b3f.pdf, Device Class L1=Electromechanical, Device Class L2=Switches, Device Class L3="Tactile Switches", Digikey Description="SWITCH TACTILE SPST-NO 0.05A 24V", Electromechanical Life=3000000Cycles, Height=4.5mm, Lead Free=Yes, Manufacturer Part Number=B3F-4000, Mount="Through Hole", Mouser Description="Tactile Switches 12x12mm Std Ht 4.3 Gen Purpose 130g", Octopart=https://octopart.com/b3f-4000-omron-22510, Package=B3F-4000, RoHS=TRUE, Temperature Range High=+70°C, Temperature Range Low=-25°C, Throw Configuration=SPST-NO
U1: library part CMP-0243-00136-1, "ARM Cortex-M4 32-bit MCU+FPU, 128 KB Flash, 64 KB Internal RAM, 36 I/Os, 48-Pin UFQFPN, -40 to 85 degC, Tape and Reel", I/Os (High Current)=36, Operating Frequency(F) (Processor speed) (MHz)=84, Package Description=UFQFPN48, Package Reference="48-Pin Ultra Thin Fine Pitch Quad Flat No-Lead, 7 x 7 x 0.6 mm Body, 0.5 mm Pitch, Exposed Pad", Supply Voltage(Vcc) min (V)=1.7, ComponentLink1Description="Manufacturer URL", ComponentLink1URL=http://www.st.com/, ComponentLink2Description=Datasheet, ComponentLink2URL=http://www.st.com/st-web-ui/static/active/en/resource/technical/document/datasheet/DM00086815.pdf, Core="ARM Cortex-M4", DatasheetVersion="Rev. 5", FLASH Size (Prog) (kB)=128, Internal RAM Size (kB)=64, Mounting Technology="Surface Mount", Packing="Tape and Reel"
U2: library part CMP-2000-05779-1, "EZBuck(TM) 1.2 A Simple Buck Regulator, 4.5 to 36 V, -40 to 85 degC, 6-Pin SOT23-6L, RoHS, Tape and Reel", Current - Output=1.2A, Frequency - Switching=450kHz, Manufacturer="Alpha and Omega", Operating Temperature=-40°C~85°C(TA), Package / Case=SOT-23-6, Package Description="6-Pin Small Outline Transistor, Body 1.6 x 2.9 mm, Pitch 0.95 mm", Package Reference=SOT23-6L, Standard Package=1, Voltage - Input (Max)=36V, Voltage - Input (Min)=4.5V, Voltage - Output (Min/Fixed)=0.8V, Category=IntegratedCircuits(ICs), Datasheet URL=https://datasheet.ciiva.com/15081/aoz1282ci-15081829.pdf, Datasheet Version="Rev. 1.1, 06/2014", Family=PMIC-VoltageRegulators-DCDCSwitchingRegulators, Function=Step-Down, Manufacturer URL=http://www.aosmd.com/, Mounting Technology=SurfaceMount, Mounting Type=SurfaceMount, Number of Outputs=1, Online Catalog=Buck(Step-Down)IC, Other Names=785-1613-6, Other Related Documents=AOSGreenPolicy, Output Configuration=Positive, Output Type=Adjustable, Packaging=Digi-Reel®, Series=EZBuck™, Supplier Device Package=SOT-23-6, Synchronous Rectifier=No, Topology=Buck, Voltage - Output (Max)=36V

## Via types
v1: diameter 0.5, hole 0.2, L1 Top Layer to L4 Bottom Layer, 25 vias

## Nets (pads, with @x,y where several pads share a name; then routed paths per layer and width w, separated by ;. In a path a pad name is that pad's centre, name@x,y a point inside that pad or via, vN(x,y) a via of type N, cw(c..) or ccw(c..) an arc to the next point about the centre after c; other vN are vias at no path point)
3V3: C3.1 C4.2 C5.2 C6.2 C7.2 C9.1 C10.1 J3.1 L1.2 R1.1 R5.1 R7.2 R8.2 R9.2 R18.2 R19.2 U1.1 U1.9 U1.24 U1.36 U1.48 | length 142.4
  L3 POWER w0.2: C10.1 C10.1@64.235,98
  L3 POWER w0.254: R19.2 R18.2 R9.2 R8.2 R7.2 53.224,92.075 53.603,92.454 53.603,92.477 54.731,93.605 54.731,96.423 55.954,97.646 C9.1 ; C10.1@64.235,98 67.818,98 ; U1.9 70.846,94 67.818,97.028 67.818,98 ; U1.1 67.818,98 ; 72.39,105.029 72.434,104.985 U1.48 ; C3.1 75.438,105.029 ; U1.24 77.934,91.579 79.47,90.043 79.756,90.043 81.026,91.313 81.026,100.171 ; U1.36 78.855,98 81.026,100.171 ; 80.899,105.029 81.026,104.902 81.026,100.171 ; R1.1 92.075,105.029
  L3 POWER w0.5: R5.1 60.288,108.827 61.047,108.068 L1.2@61.047,105.279 ; C10.1 58.854,97.646 59.954,98.746 59.954,100.591 61.047,101.684 L1.2 72.39,105.029 75.438,105.029 79.248,105.029 ; C4.2 79.248,105.029 ; C5.2 82.55,105.029 ; C6.2 85.979,105.029 ; C7.2 89.281,105.029 ; J3.1 97.155,105.029 92.075,105.029 89.281,105.029 ; 79.248,105.029 80.899,105.029 82.55,105.029 ; 82.55,105.029 85.979,105.029 ; 85.979,105.029 89.281,105.029
24V: C11.1 C12.1 J1.P K1.4 R4.1 U2.5 | length 76.5
  L3 POWER w0.7: R4.1 36.818,118.134 30.885,118.134 J1.P 37.084,111.934 C11.1 C12.1 43.688,111.506 44.958,112.776 U2.5
  L3 POWER w1.2: J1.P 35.386,122.682 K1.4
"CA 1": DS1.1 Q1.3 | length 55.4
  L4 Bottom Layer w0.254: DS1.1 39.154,68.618 34.252,68.618 31.75,71.12 31.75,86.212 34.565,89.027 48.133,89.027 49.784,90.678 49.784,98.101 Q1.3
"CA 2": DS1.2 Q2.3 | length 54.9
  L4 Bottom Layer w0.254: DS1.2 41.24,68.164 33.944,68.164 31.242,70.866 31.242,86.346 34.377,89.481 43.942,89.481 45.212,90.751 45.212,98.101 Q2.3
"CA 3": DS1.6 Q3.3 | length 62.1
  L4 Bottom Layer w0.254: Q3.3 40.894,98.228 40.894,91.84 38.989,89.935 34.189,89.935 30.734,86.48 30.734,70.612 34.163,67.183 50.419,67.183 DS1.6
"CA 4": DS1.8 Q4.3 | length 63.9
  L4 Bottom Layer w0.254: Q4.3 36.576,98.228 36.576,92.964 30.226,86.614 30.226,70.358 33.909,66.675 54.991,66.675 DS1.8
"CA L1/L2/L3": DS1.4 Q5.3 | length 85.5
  L4 Bottom Layer w0.254: Q5.3 29.718,95.688 29.718,70.111 33.662,66.167 56.642,66.167 61.236,70.761 61.236,70.971 59.541,72.666 59.331,72.666 57.877,71.212 57.877,70.542 56.422,69.088 55.88,69.088 55.245,69.723 55.245,71.606 54.715,72.136 53.34,72.136 52.832,71.628 52.832,70.485 51.689,69.342 50.292,69.342 DS1.4
GND: C1.1 C2.2 C3.2 C4.1 C5.1 C6.1 C7.1 C9.2 C10.2 C11.2 C12.2 D1.2 J1.N J2.N J3.2 K1.2 R3.2 R6.2 SW1.2 SW2.4 U1.8 U1.23 U1.35 U1.47 U1.49 U2.2
  other v1: 72.984,93.05 74.084,93.05 75.184,93.05 76.284,93.05 77.384,93.05 72.984,94.15 74.084,94.15 75.184,94.15 76.284,94.15 77.384,94.15 72.984,95.25 74.084,95.25 75.184,95.25 76.284,95.25 77.384,95.25 72.984,96.35 74.084,96.35 75.184,96.35 76.284,96.35 77.384,96.35 72.984,97.45 74.084,97.45 75.184,97.45 76.284,97.45 77.384,97.45
NetC2_1: C2.1 U1.22 | length 3.2
  L4 Bottom Layer w0.254: U1.22 76.934,91.139 78.665,89.408 C2.1
NetC8_1: C8.1 U2.1 | length 5.3
  L1 Top Layer w0.5: C8.1 51.854,111.384 52.296,111.826 U2.1
NetC8_2: C8.2 D1.1 L1.1 U2.6 | length 16.5
  L1 Top Layer w0.5: U2.6 50.066,111.826 50.254,111.638 C8.2 50.254,102.376 D1.1 51.007,102.338 53.698,105.029 L1.1
NetDS1_3: DS1.3 R13.2 | length 17.6
  L4 Bottom Layer w0.254: DS1.3 46.355,73.533 51.181,78.359 51.181,84.768 52.234,85.821 R13.2
NetDS1_5: DS1.5 R14.2 | length 23.8
  L4 Bottom Layer w0.254: R14.2 46.011,86.071 46.681,86.741 52.676,86.741 52.886,86.531 52.886,85.271 51.635,84.02 51.635,70.939 DS1.5
NetDS1_7: DS1.7 R17.2 | length 61.6
  L4 Bottom Layer w0.254: R17.2 28.358,85.821 29.264,84.915 29.264,69.923 33.528,65.659 57.531,65.659 62.23,70.358 62.23,71.247 60.198,73.279 59.055,73.279 DS1.7
NetDS1_11: DS1.11 R15.2 | length 20.2
  L4 Bottom Layer w0.254: R15.2 40.042,86.071 40.24,86.269 40.365,86.269 41.291,87.195 52.864,87.195 53.975,86.084 DS1.11
NetDS1_13: DS1.13 R12.2 | length 33.6
  L4 Bottom Layer w0.254: DS1.13 48.895,83.693 47.879,84.709 39.751,84.709 39.37,85.09 39.37,86.487 39.39,86.507 39.39,86.531 40.524,87.665 57.914,87.665 R12.2
NetDS1_14: DS1.14 R10.2 | length 48.5
  L4 Bottom Layer w0.254: DS1.14 44.958,82.296 43.654,82.296 42.545,81.187 42.545,80.391 41.951,79.797 40.345,79.797 38.354,81.788 38.354,86.779 40.148,88.573 56.816,88.573 57.27,89.027 67.982,89.027 69.056,87.953 69.181,87.953 69.379,87.755 R10.2
NetDS1_15: DS1.15 R16.2 | length 16.6
  L4 Bottom Layer w0.254: R16.2 33.946,81.878 37.592,78.232 41.148,78.232 DS1.15
NetDS1_16: DS1.16 R11.2 | length 33.2
  L4 Bottom Layer w0.254: DS1.16 38.862,83.312 38.862,86.645 40.336,88.119 57.004,88.119 57.277,88.392 63.41,88.392 63.849,87.953 63.974,87.953 64.172,87.755 R11.2
NetJ2_P: J2.P K1.3 | length 22.3
  L3 POWER w1.2: K1.3 92.924,122.682 J2.P
NetQ1_2: Q1.2 R7.1 | length 6.9
  L4 Bottom Layer w0.254: R7.1 51.447,96.414 Q1.2
NetQ2_2: Q2.2 R8.1 | length 6.7
  L4 Bottom Layer w0.254: R8.1 47.383,96.922 Q2.2
NetQ3_2: Q3.2 R9.1 | length 6.6
  L4 Bottom Layer w0.254: R9.1 43.192,97.176 Q3.2
NetQ4_2: Q4.2 R18.1 | length 6.9
  L4 Bottom Layer w0.254: R18.1 38.112,96.414 Q4.2
NetQ5_2: Q5.2 R19.1 | length 7.2
  L4 Bottom Layer w0.254: R19.1 33.032,95.652 Q5.2
NetR2_1: R2.1 U1.25 | length 42.9
  L1 Top Layer w0.254: R2.1 78.802,107.95 81.407,105.345 81.407,92.964 86.995,87.376 86.995,85.471 85.598,84.074 84.074,84.074 80.191,87.957 80.191,91.887 79.578,92.5 U1.25
NetR3_1: R3.1 U1.44 | length 6.8
  L1 Top Layer w0.254: R3.1 72.66,100.838 74.432,99.066 74.432,98.652 U1.44
NetR4_2: R4.2 U2.4 | length 13.5
  L1 Top Layer w0.5: R4.2 38.342,117.985 42.601,113.726 U2.4
NetR5_2: R5.2 R6.1 U2.3 | length 8.7
  L1 Top Layer w0.5: U2.3 52.412,113.695 55.275,113.695 55.275,112.238 57.023,110.49 R5.2
NRST: C1.2 J3.5 R1.2 SW1.1 U1.7 | length 69.8
  L4 Bottom Layer w0.254: U1.7 70.862,95 69.977,95.885 69.977,98.933 71.12,100.076 93.345,100.076 94.361,101.092 94.361,106.045 95.631,107.315 99.441,107.315 100.457,106.299 100.457,97.409 J3.5 97.18,94.488 96.799,94.869 96.012,94.869 96,94.881 R1.2 91.998,94.958 C1.2 89.206,94.958 88.052,93.804 SW1.1
PA0: R10.1 U1.10 | length 8.4
  L1 Top Layer w0.254: R10.1 70.829,87.755 69.469,89.115 69.469,92.837 70.132,93.5 U1.10
PA1: R11.1 U1.11 | length 15.9
  L1 Top Layer w0.254: R11.1 65.622,87.505 67.418,85.709 71.002,85.709 71.526,86.233 71.526,89.51 69.977,91.059 69.977,92.456 70.521,93 U1.11
PA2: R12.1 U1.12 | length 21.8
  L1 Top Layer w0.254: R12.1 59.526,87.378 61.649,85.255 71.247,85.255 71.98,85.988 71.98,89.698 70.612,91.066 70.612,92.202 70.91,92.5 U1.12
PA3: R13.1 U1.13 | length 25.8
  L1 Top Layer w0.254: R13.1 53.684,85.821 54.704,84.801 71.459,84.801 72.434,85.776 U1.13
PA4: R14.1 U1.14 | length 33
  L1 Top Layer w0.254: R14.1 47.461,85.821 48.935,84.347 71.647,84.347 72.934,85.634 U1.14
PA5: R15.1 U1.15 | length 40
  L1 Top Layer w0.254: R15.1 41.492,85.821 41.69,85.623 41.815,85.623 43.545,83.893 71.955,83.893 73.434,85.372 U1.15
PA6: R16.1 U1.16 | length 47.1
  L1 Top Layer w0.254: R16.1 35.396,85.821 35.594,85.623 35.719,85.623 37.903,83.439 72.256,83.439 73.934,85.117 U1.16
PA7: R17.1 U1.17 | length 53.7
  L1 Top Layer w0.254: R17.1 29.808,85.821 30.006,85.623 30.131,85.623 32.823,82.931 72.39,82.931 74.434,84.975 U1.17
PB0: Q1.1 U1.18 | length 78.9
  L3 POWER w0.254: Q1.1 51.685,98.552 35.814,98.552 31.623,94.361 31.623,90.043 36.195,85.471 73.152,85.471 74.934,87.253 U1.18
PB1: Q2.1 U1.19 | length 77
  L3 POWER w0.254: Q2.1 47.748,99.187 35.433,99.187 30.988,94.742 30.988,89.862 35.941,84.909 73.279,84.909 75.434,87.064 U1.19
PB2: Q3.1 U1.20 | length 75.1
  L3 POWER w0.254: Q3.1 35.494,100.137 30.353,94.996 30.353,89.662 35.56,84.455 73.533,84.455 75.934,86.856 U1.20
PB10: Q4.1 U1.21 | length 61
  L4 Bottom Layer w0.254: Q4.1 37.223,100.137 36.322,99.236 35.255,99.236 34.671,99.821 34.671,102.489 37.973,105.791 53.848,105.791 70.612,89.027 75.692,89.027 76.434,89.769 U1.21
PB14: Q5.1 U1.27 | length 61.3
  L4 Bottom Layer w0.254: Q5.1 35.617,102.419 38.227,105.029 53.721,105.029 70.993,87.757 78.867,87.757 80.264,89.154 80.264,92.71 79.474,93.5 U1.27
RELAY_CTRL: K1.1 R2.2 | length 7.9
  L1 Top Layer w0.4: K1.1 70.485,110.109 72.644,107.95 R2.2
SW2: SW2.1 U1.26 | length 9.6
  L1 Top Layer w0.254: U1.26 79.72,93 80.645,92.075 80.645,90.23 SW2.1
SWCLK: J3.4 U1.37 | length 39
  L4 Bottom Layer w0.254: U1.37 77.934,98.921 78.581,99.568 93.599,99.568 94.996,100.965 94.996,106.038 95.819,106.861 99.253,106.861 99.949,106.165 99.949,99.441 J3.4
SWDIO: J3.3 U1.34 | length 20
  L4 Bottom Layer w0.254: U1.34 78.855,97 80.014,98.159 96.127,98.159 J3.3
pads on no net: DS1.9 SW1. SW2. SW2.2 SW2.3 U1.2 U1.3 U1.4 U1.5 U1.6 U1.28 U1.29 U1.30 U1.31 U1.32 U1.33 U1.38 U1.39 U1.40 U1.41 U1.42 U1.43 U1.45 U1.46

## Polygon pours and split planes (outlines as drawn)
GND on L2 GND "GND_L02_P000" (solid, pour order 0): 25.527,126.873 25.654,127 101.473,127 101.473,63.881 101.346,63.754 25.146,63.754